# EAGLE board Pot (EAGLE 3.55)

No outline drawn. Coordinates in mm, seen from the top.
Copper layers used: 

## Footprints (pad centres in the part's own frame; a part is rotated, then mirrored left to right if it is on the bottom)
TF_1 = drill 0.813 pad 3.302 round:  -5.08,-17.78;  0,-17.78;  5.08,-17.78
TF_1A = drill 0.813 pad 3.302 round:  -5.08,-19.05;  0,-19.05;  5.08,-19.05
TH_1 = drill 0.813 pad 3.302 round:  5.08,3.81;  0,3.81;  -5.08,3.81
TH_2 = drill 0.813 pad 3.302 round:  5.08,3.81;  0,3.81;  -5.08,3.81;  5.08,-6.35;  0,-6.35;  -5.08,-6.35
TH_3 = drill 0.813 pad 3.302 round:  5.08,13.97;  0,13.97;  -5.08,13.97;  5.08,3.81;  0,3.81;  -5.08,3.81;  5.08,-6.35;  0,-6.35;  -5.08,-6.35
TH_4 = drill 0.813 pad 3.302 round:  5.08,13.97;  0,13.97;  -5.08,13.97;  5.08,3.81;  0,3.81;  -5.08,3.81;  5.08,-6.35;  0,-6.35;  -5.08,-6.35;  5.08,-16.51;  0,-16.51;  -5.08,-16.51
TL_1 = drill 0.813 pad 3.302 round:  -3.81,30.48;  -3.81,-30.48;  -3.81,-25.4
TL_1-1 = drill 0.813 pad 3.302 round:  -3.81,-31.75;  3.81,3.81;  -3.81,8.89
TL_2 = drill 0.813 pad 3.302 round:  -3.81,30.48;  3.81,30.48;  3.81,25.4;  -3.81,-25.4;  -3.81,-30.48;  3.81,-30.48

## Placement (x,y rotation side)
E$1  [-35SC]  0,0 0 top
POTF_1  [TF_1]  144.78,119.38 0 top
POTF_1A  [TF_1A]  144.78,68.58 0 top
POTH_1  [TH_1]  38.1,185.42 0 top
POTH_2  [TH_2]  76.2,185.42 0 top
POTH_3  [TH_3]  114.3,175.26 0 top
POTH_4  [TH_4]  152.4,175.26 0 top
POTL_1  [TL_1]  38.1,109.22 0 top
POTL_1-1  [TL_1-1]  104.14,109.22 0 top
POTL_2  [TL_2]  71.12,109.22 180 top

## Library data of the parts
E$1 = BLATT
POTF_1 POTF_1A POTH_1-POTH_4 POTL_1 POTL_1-1 POTL_2 = Pot